# Altium PCB PCB-ESP32-C3-RF-V1.0.PcbDoc (part 4 of 4)
Units mil, origin at the board's own origin, x right, y up, seen from the top; angles counter-clockwise.
Board outline 1166.03 x 1736.03 mil, 4 copper layers (L1, L2, L3, L4), stack 30.315 mil thick; 70 components, 58 nets, 232 pads, 398 vias.
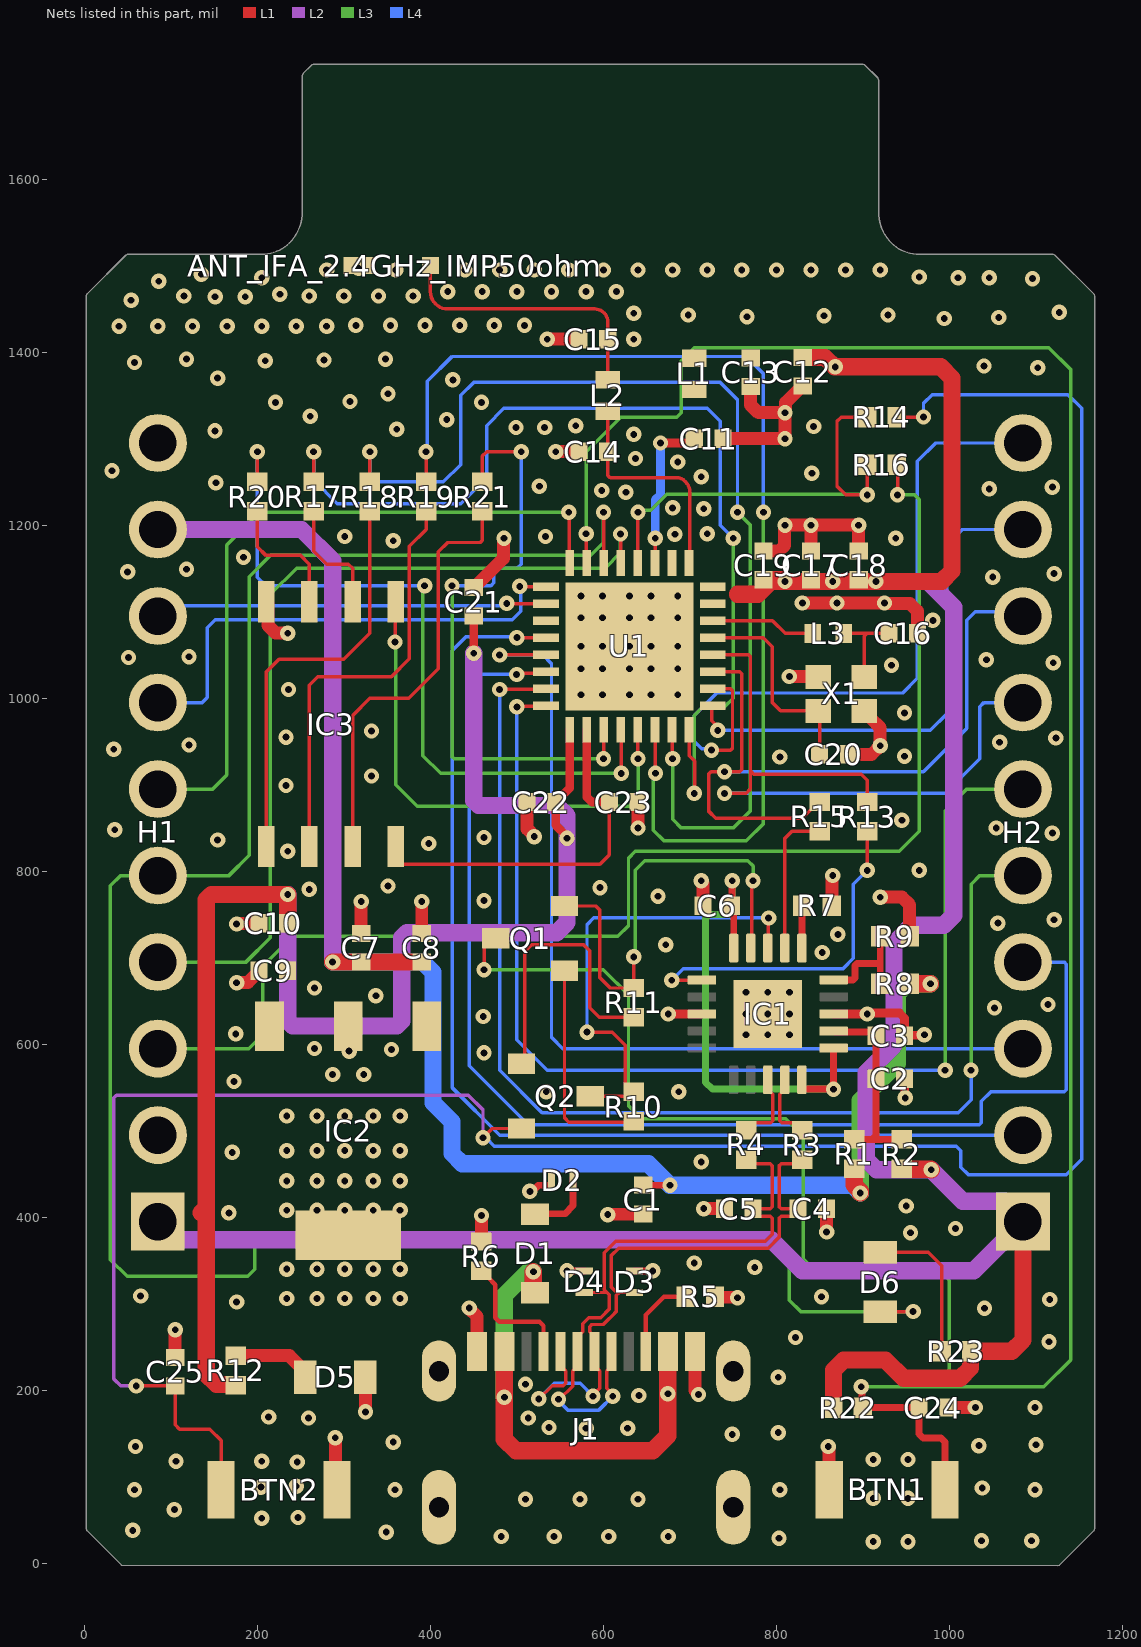
[diagram p4: the nets of this part, all layers, seen from the top]

## Via types
v1: diameter 17.72, hole 7.87, L1 to L4, tented both sides, 398 vias

## Nets (pads, with @x,y where several pads share a name; then routed paths per layer and width w, separated by ;. In a path a pad name is that pad's centre, name@x,y a point inside that pad or via, vN(x,y) a via of type N, cw(c..) or ccw(c..) an arc to the next point about the centre after c; other vN are vias at no path point)
+3V3: C9.2 C10.2 C12.2 C13.2 C17.1 C18.2 C19.2 C21.2 C22.2 H1.1 H2.1 IC2.3 L1.2 R2.2 R12.2 R22.2 R23.2 U1.11 U1.17 U1.31 U1.32 | length 5236.6
  L1 w10: v1(450,1052) C21.2@450,1095 ; C22.2@544.84,880 544.84,853.25 558,840.09 v1(558,838) ; C22.2@549.68,885.63 550.47,885.63 561.1,896.26 U1.17@561.1,963.59
  L1 w20: H1.1@85,395 H1.1@95.14,405.14 ; 135.14,405.14 141,411 ; R12.2@175,205.98 174.37,206.61 152.72,206.61 141,218.33 141,411 ; C10.2@235,740 v1(235,773) 146.86,773 141,767.14 141,411 ; 755,1120 778.7,1120 793.7,1135 v1(810,1135) ; C19.2@785,1136.93 808.07,1136.93 v1(810,1135) ; C12.2@830.57,1393.9 856.2,1393.9 867.1,1383 v1(868,1383) 990,1383 1003,1370 1003,1147 991,1135 v1(915,1135) v1(865,1135) v1(810,1135) ; R22.2@865.98,180 865.98,223.28 877.7,235 926,235 947,214 1012.65,214 1024.37,225.72 1024.37,244.37 R23.2@1025,245 1072,245 1085,258 H2.1@1085,395 ; R2.2@945,455.98 945.49,455.49 978.51,455.49 v1(979,455)
  L2 w20: H1.1@85,395 106,374 794,374 830,338 1028,338 1061.54,371.54 1064,371.54 1085,392.54 H2.1@1085,395 ; v1(235,773) 235,626.86 240.86,621 361.14,621 367,626.86 367,723.14 372.86,729 546,729 558,741 558,864.28 546.28,876 455.86,876 450,881.86 v1(450,1052) ; v1(810,1135) v1(865,1135) 975,1135 1005,1105 1005,749.22 993.28,737.5 956.5,737.5 936,717 936,599 904,567 904,466.72 915.72,455 v1(979,455) 1015.54,418.46 H2.1@1064,418.46
  L3 w20: H2.1@1064,418.46 1085,397.46 H2.1@1085,395
+3V3_RF: C11.2 L1.1 U1.2 U1.3 | length 182.3
  L1 w4: U1.3@659.53,1156.41 659.76,1156.64 659.76,1184.76 v1(660,1185) ; C11.2@700,1295 C11.2@705,1300
  L1 w10: v1(666,1295) C11.2@700,1295
  L4 w10: v1(660,1185) 660,1229.57 666,1235.57 v1(666,1295)
+5V: C1.2 C7.2 C8.2 D1.C D2.2 H1.9 IC2.1 R1.2 R8.2 | length 2070.4
  L1 w8: D1.C@521,403.28 521.72,404 555.37,404 565,413.63 D2.2@565,443 D2.2@565,444.47 ; C1.2@646,437 v1(677,437)
  L1 w20: v1(287,695) C7.2@320,695 C8.2@390,695 ; R1.2@890,455.98 890,437.17 897,430.17 v1(897,428) ; R8.2@954.02,670 v1(978,670)
  L2 w20: H1.9@85,1195 251,1195 287,1159 v1(287,695)
  L3 w20: v1(897,428) 897,535 940,578 940,658.28 951.72,670 v1(978,670)
  L4 w20: v1(287,695) 391.28,695 403,683.28 403,532.45 424.95,510.5 424.95,473.72 436.67,462 652,462 v1(677,437) 888,437 v1(897,428)
BTN_GPIO_0: BTN2.2 C25.2 Q2.2 R14.1 | length 2922.6
  L1 w4: v1(60,205) C25.2@105,205 105,160 110,155 145,155 158.07,141.93 BTN2.2@158.07,85 ; v1(460.79,491.79) 471.6,502.6 Q2.2@505.24,502.6 ; R14.1@939.02,1325 v1(970,1325)
  L2 w4: v1(60,205) 42,205 34,213 34,538 37.14,541.14 443.86,541.14 460.79,524.21 v1(460.79,491.79)
  L4 w4: v1@55,210 v1(60,205) ; v1(460.79,491.79) 464.21,491.79 474,482 1008,482 1013,477 1013,458 1022,449 1135,449 1153,467 1153,1335 1137,1351 980,1351 970,1341 v1(970,1325)
CHIP_EN: BTN1.2 C24.2 Q1.3 R22.1 U1.7 | length 3409.4
  L1 w4: v1(462,686) 462,712.59 471.81,722.4 Q1.3@475.47,722.4 ; v1(580,1190) 580.39,1189.61 580.39,1156.8 U1.7@580.79,1156.41
  L1 w8: v1(898,204) 899,203 899,181 R22.1@900,180 C24.2@965,180 965,149.69 969.69,145 990.31,145 995,140.31 BTN1.2@995,85
  L3 w4: v1(462,686) 600,686 629,657 629,529 644,514 811,514 831,494 831,352 849,334 993,334 1000,327 1000,213.92 1009.92,204 ; v1(580,1190) 580,1285 620,1325 685,1325 690,1330 690,1390 705,1405 1115,1405 1140,1380 1140,235 1109,204 1009.92,204 ; v1(898,204) 1009.92,204
DTR_FTDI: IC1.18 Q2.3 R10.1 | length 533.9
  L1 w4: v1(581,614) 610,614 625.19,598.81 625.19,553.63 633.82,545 R10.1@635,545 630,540 Q2.3@584.76,540 ; IC1.18@790,711.18 790.5,711.68 790.5,745.5 v1(791,746)
  L4 w4: v1(581,614) 581,738 589,746 v1(791,746)
FTDI_USB_N: IC1.9 R3.2 | length 80.4
  L1 w4: IC1.9@809.68,558.82 809.68,547.6 806.37,544.28 806.19,544.28 803.84,541.94 803.84,511.6 806.19,509.26 821.37,509.26 R3.2@830,500.63
FTDI_USB_P: IC1.8 R4.2 | length 83.7
  L1 w4: R4.2@765,504.02 770.24,509.26 793.5,509.26 795.84,511.6 795.84,541.94 793.5,544.28 793.32,544.28 790,547.6 IC1.8@790,558.82
GND: ANT_IFA_2.4GHz_IMP50ohm.1 BTN1.1 BTN2.1 C1.1 C2.1 C3.1 C4.1 C5.1 C6.1 C7.1 C8.1 C9.1 C10.1 C11.1 C12.1 C13.1 C14.1 C15.1 C16.1 C17.2 C18.1 C19.1 C20.1 C21.1 C22.1 C23.1 C24.1 C25.1 D2.1 D3.2 D4.2 D5.1 H1.2 H1.10 IC1.3 IC1.13 IC1.21 IC2.2 IC2.4 IC3.4 J1.A1B12 J1.B1A12 J1.SH1 J1.SH2 J1.SH3 J1.SH4 R5.2 R6.2 R7.1 R9.1 U1.33 X1.2 X1.4 | length 1960.1
  L1 w8: v1(515,429.86) 517.63,429.86 524.76,436.98 D2.1@539.97,436.98 ; D2.1@540,437.02 D2.1@540,443 ; v1(558,338) D4.2@578,338 ; D3.2@636,338 v1(657,338)
  L1 w10: v1(605,403) v1@605.47,403.47 ; C1.1@646.47,403.47 C1.1@647,404 ; v1(675,635) IC1.3@713.82,635 ; IC1.13@866.18,635 v1(905,635) 906.06,636.06 942.21,636.06 948.07,630.2 C3.1@948.07,610 948.57,610.5 970.5,610.5 v1(971,611) ; C2.1@948.07,560 948.53,559.53 948.53,538.47 v1(949,538)
  L1 w15: C25.1@105,238.07 v1(105,270) ; v1(176,671) 176.52,671.52 189.24,671.52 201.93,684.21 C9.1@201.93,685 ; v1(176,739) 176.5,739.5 201.43,739.5 C10.1@201.93,740 ; IC3.4@210,1111.53 212,1109.53 212,1084.31 220.79,1075.52 234.48,1075.52 v1(235,1075) ; v1(290,145) 290.52,144.48 290.52,86.41 BTN2.1@291.93,85 ; C7.1@320,728.07 v1(320,765) ; D5.1@324.5,215 324.75,214.75 324.75,175.25 v1(325,175) ; C8.1@390,728.07 v1(390,765) ; v1(445,295) 445,294.26 454.02,285.25 J1.A1B12@454.02,244.84 ; C21.1@450,1128.07 450.79,1128.07 484.48,1161.76 484.48,1184.48 v1(485,1185) ; R6.2@459,372 v1(459,402) ; C22.1@511.77,880 511.77,848.96 520,840.74 v1(520,840) ; v1(535,1415) C15.1@571.93,1415 ; v1(545,1285) C14.1@571.93,1285 ; v1@605.47,403.47 C1.1@646.47,403.47 ; C23.1@639.84,880 639.92,879.92 639.92,850.08 v1(640,850) ; v1@679.26,1220 v1(680,1220) v1@680,1219.26 ; J1.B1A12@705.98,244.84 705.98,199.75 710,195.74 v1(710,195) ; v1(713,789) 713,788.26 715,786.26 C6.1@715,760 ; v1(716,410) C5.1@739.93,410 ; R5.2@729,308 729.5,307.5 754.5,307.5 v1(755,307) ; C11.1@738.07,1300 v1(810,1300) v1(810,1330) ; C13.1@770.28,1360.07 770.28,1338.79 779.07,1330 v1(810,1330) ; C19.1@785,1170 785.16,1170.16 803.02,1170.16 809.48,1176.62 809.48,1199.48 v1(810,1200) v1(840,1200) ; v1(815,1025) 848.11,1025 X1.2@848.43,1024.69 ; v1(830,1110) v1(870,1110) v1(925,1110) 925.52,1109.48 954.28,1109.48 963.07,1100.69 C16.1@963.07,1075 ; C12.1@830.57,1360.83 829.78,1360.83 810.52,1341.57 810.52,1330.52 v1(810,1330) ; C17.2@840,1170 v1(840,1200) ; v1(858,383) C4.1@858.03,409.97 ; v1(860,135) 860.52,134.48 860.52,85.62 BTN1.1@861.14,85 ; R7.1@864.02,760 864.02,793.28 865,794.26 v1(865,795) ; C20.1@883.07,935 909.96,935 v1(920,945) ; C18.1@895,1170 v1(895,1200) v1(840,1200) ; X1.4@901.57,985.31 902.56,985.31 908.84,979.04 908.84,977.07 920,965.91 v1(920,945) ; v1(920,770) 945.23,770 954.02,761.21 R9.1@954.02,725 ; C24.1@998.07,180 v1(1030,180)
  other v1: 912,25 952,25 1037,26 1095,26 803,29 482,31 543,31 606,31 675,31 349,36 56,38 205,52 247,53 104,62 510,74 573,74 640,74 912,75 952,75 58,85 359,85 804,85 1099,85 1038,87 204,88 245,89 246,117 106,118 205,118 912,120 952,120 59,135 1034,136 1100,137 357,140 749,149 802,151 580,156 628,156 537,157 259,168 513,168 213,169 1099,180 641,194 510,207 802,215 1115,256 822,261 1040.63,294.75 176,302 1116,305 234,306 269,306 301,306 334,306 365,306 852,308 65,309 234,340 269,340 301,340 334,340 365,340 775,342 705,347 955,382 1007,387 167,405 234,408 269,408 301,408 334,408 365,408 950,413 234,442 269,442 301,442 334,442 365,442 713,464 171,475 234,477 269,477 301,477 334,477 365,477 234,517 269,517 301,517 334,517 365,517 534,545 687,545 173,557 287,565 323,565 462,590 306,592 355,594 266,595 765,610.86 790,610.86 815,610.86 175,612 461,632 765,635 790,635 815,635 1052,642 1114,646 337,656 765,660 790,660 815,660 266,665 853,706 672,715 871,727 1056,740 1121,744 462,766 663,771 260,779 596,781 351,783 965,801 235,823 398,832 154,836 462,839 1119,844 35,847.87 1054,850 945,859 233,899 332,910 804,932 948,933 34,941 121,946 1058,949 1123,954 233,955 332,962 948,983 574,1004 599,1004 630,1004 655,1004 686,1004 236,1010 574,1034 599,1034 630,1034 655,1034 686,1034 933,1038 1120,1041 1042.68,1044.37 51,1047 121,1048 574,1060 599,1060 630,1060 655,1060 686,1060 980.86,1090 574,1093 599,1093 630,1093 655,1093 686,1093 574,1118 599,1118 630,1118 655,1118 686,1118 1050,1140 1121,1144 50,1146 118,1149 184,1163 357,1182 938,1185 301,1187 533,1187 682.62,1189.63 720,1190 716,1219 626,1238 598,1240 1046,1242 1119,1244 526,1245 152,1249 713,1256 841,1260 32,1263 686,1273 637,1277 635,1305 151,1309 361,1311 499,1313 532,1313 843,1314 568,1315 419,1322 261,1326 221,1342 459,1342 307,1343 351,1352 426,1368 154,1370 1102,1382 1040,1384 58,1388 209,1390 277,1391 118,1392 348,1392 635,1415 40,1430 85,1430 125,1430 165,1430 205,1430 245,1430 280,1430 313.83,1430.94 353.83,1430.94 393.83,1430.94 433.83,1430.94 473.83,1430.94 508.83,1430.94 994,1439 1057,1440 766,1441 855,1442 698,1443 929,1443 635,1445 1127,1446 54,1460 151.17,1464.06 186,1464 115,1465 260,1465 300,1465 340,1465 380,1465 226,1467 420,1470 460,1470 500,1470 540,1470 580,1470 615,1470 86,1482 1096,1485 205,1486 1010,1486 1046,1486 965,1487 135,1490 280,1495 360,1495 440,1495 480,1495 520,1495 560,1495 600,1495 640,1495 680,1495 720,1495 760,1495 800,1495 840,1495 880,1495 920,1495 317,1497
GPIO_0: H1.3 R16.1 | length 1522.2
  L1 w4: R16.1@939.02,1270 940,1269.02 v1(940,1235)
  L3 w4: H1.3@85,595 190,595 206,611 206,690 240.66,724.66 616.66,724.66 629,737 629,815 637,823 942,823 965,846 965,1229.66 959.66,1235 v1(940,1235)
GPIO_1: H1.4 U1.5 | length 1018.5
  L1 w4: v1(619.68,1189.84) 620,1189.52 620,1185 620.16,1184.84 U1.5@620.16,1156.41
  L3 w4: H1.4@85,695 186.87,695 215,723.13 215,1120 245.28,1150.28 601.91,1150.28 619.68,1168.05 v1(619.68,1189.84)
GPIO_2: D6.1 H1.5 U1.6 | length 2509.6
  L1 w4: v1@600,1210 600.24,1209.76 600.24,1156.64 U1.6@600.47,1156.41 ; D6.1@920,290.5 920.5,291 v1(958,291)
  L3 w4: v1(600,1215) 600,1179.47 585.59,1165.06 215.19,1165.06 190.5,1140.38 190.5,818.29 167.22,795 H1.5@85,795 42,795 30,783 30,351 49.34,331.66 189,331.66 189,332 197,340 197,364 206,373 790,373 815,348 815,304 828,291 v1(958,291)
GPIO_3: H1.6 U1.8 | length 817.3
  L1 w4: v1@560,1210 560.55,1209.45 560.55,1156.96 U1.8@561.1,1156.41
  L3 w4: H1.6@85,895 148.51,895 164.76,911.25 164.76,1177.11 202.65,1215 v1(560,1215)
GPIO_4: H1.7 U1.9 | length 570
  L1 w4: v1(503.23,1129.28) 503.42,1129.09 533.4,1129.09 U1.9@533.59,1128.9
  L4 w4: H1.7@85,995 136.02,995 141.81,1000.79 141.81,1081.43 151.24,1090.86 494.75,1090.86 504.2,1100.31 504.2,1128.31 v1(503.23,1129.28)
GPIO_5: H1.8 U1.10 | length 454.8
  L1 w4: v1(488.34,1109.6) 488.73,1109.21 U1.10@533.59,1109.21
  L4 w4: H1.8@85,1095 96.98,1106.98 485.72,1106.98 v1(488.34,1109.6)
GPIO_6: H2.2 U1.12 | length 1303.7
  L1 w4: v1(500,1070) 500.08,1069.92 533.52,1069.92 U1.12@533.59,1069.84
  L4 w4: v1(500,1070) 498.7,1071.3 441.3,1071.3 425,1055 425,550 480,495 H2.2@1085,495
GPIO_7: H2.3 U1.13 | length 1100.2
  L1 w4: v1(480,1050) 480.08,1050.08 533.52,1050.08 U1.13@533.59,1050.16
  L4 w4: v1(480,1050) 530,1050 540,1040 540,608 553,595 H2.3@1085,595
GPIO_8: H2.4 U1.14 | length 1483.5
  L1 w4: v1(499.69,1027.45) 501.2,1028.96 532.08,1028.96 U1.14@533.59,1030.47
  L4 w4: v1(499.69,1027.45) 452.45,1027.45 445,1020 445,575 513,507 1034.66,507 1037,509.34 1037,534 1048,545 1132.66,545 1135,547.34 1135,692.66 1132.66,695 H2.4@1085,695
GPIO_9: H2.5 U1.15 | length 1378.6
  L1 w4: v1(480,1010) 480.39,1010.39 533.2,1010.39 U1.15@533.59,1010.79
  L3 w4: v1(1025,570) 1025,785 1035,795 H2.5@1085,795
  L4 w4: v1(480,1010) 480,570 529,521 1010,521 1025,536 v1(1025,570)
GPIO_10: H2.6 U1.16 | length 1328.9
  L1 w4: v1(500,990) 500.55,990.55 533.04,990.55 U1.16@533.59,991.1
  L3 w4: v1(995,570) 995,870 1020,895 H2.6@1085,895
  L4 w4: v1(500,990) 500,605 535,570 v1(995,570)
GPIO_18: H2.9 U1.25 | length 595
  L1 w4: U1.25@726.41,991.1 725,989.7 725,973.71 732.17,966.54 v1(732.17,962.83)
  L4 w4: v1(732.17,962.83) 977.83,962.83 996.72,981.72 996.72,1176.72 1015,1195 H2.9@1085,1195
GPIO_19: H2.10 U1.26 | length 826.7
  L1 w4: v1(725,940) 746.87,940 749.21,942.34 749.21,1008.44 746.87,1010.79 U1.26@726.41,1010.79
  L4 w4: v1(725,940) 723.49,941.51 713.49,941.51 705,950 705,980 731,1006 946,1006 963,1023 963,1274 984,1295 H2.10@1085,1295
LNA_IN: C14.2 L2.2 U1.1 | length 262.1
  L1 w4: L2.2@605,1331.89 C14.2@605,1285 605,1258.87 ccw(c609,1258.87) 609,1254.87 685,1255 cw(c685,1242.93) 693.54,1251.46 695,1250 cw(c682.93,1237.93) 700,1237.93 700,1159.07 cw(c696.24,1159.07) U1.1@698.9,1156.41
NetANT_IFA_2.4GHz_IMP50ohm_2: ANT_IFA_2.4GHz_IMP50ohm.2 C15.2 L2.1 | length 321.9
  L1 w4: ANT_IFA_2.4GHz_IMP50ohm.2@400,1500 400,1470 ccw(c420,1470) 420,1450 590,1450 cw(c590,1435) 605,1435 C15.2@605,1415 L2.1@605,1368.11
NetC2_2: C2.2 C3.2 IC1.12 R1.1 R2.1 | length 228
  L1 w8: IC1.12@866.18,615.31 867.5,614 911,614 C3.2@915,610 C2.2@915,560 915,494.69 910.31,490 ; R1.1@890,490 910.31,490 ; R2.1@945,490 910.31,490
NetC6_2: C6.2 IC1.10 IC1.11 IC1.20 | length 584.2
  L1 w8: v1(749,789) 748.53,788.53 748.53,760.47 C6.2@748.07,760 750.63,757.44 IC1.20@750.63,711.18 ; IC1.10@829.37,558.82 829.37,549.31 830.69,548 v1(866,548) 866,595.45 IC1.11@866.18,595.63
  L3 w8: v1(749,789) 749,754.69 744.31,750 722.69,750 718,745.31 718,556 726,548 v1(866,548)
  L4 w8: v1@865.5,548.5 v1(866,548)
NetC16_2: C16.2 L3.1 X1.1 | length 103.7
  L1 w4: L3.1@878,1075 905,1075 ; X1.1@901.57,1024.69 901.57,1071.57 905,1075 ; C16.2@930,1075 905,1075
NetD1_A: D1.A J1.A4B9 J1.B4A9 | length 588
  L1 w20: J1.A4B9@485.51,244.84 485.51,143.49 499,130 657,130 674.49,147.49 J1.B4A9@674.49,244.84 ; v1(519,337) 519,314.72 D1.A@521,312.72
  L3 w20: v1(485.51,192) 485.51,309.51 513,337 v1(519,337)
  other v1: 674.49,196
NetD5_2: D5.2 R12.1 | length 94.7
  L1 w15: R12.1@175,240 237,240 255.5,221.5 D5.2@255.5,215
NetD6_2: D6.2 R23.1 | length 176.4
  L1 w4: D6.2@920,359.5 975.5,359.5 990.98,344.02 R23.1@990.98,245
NetIC1_15: IC1.15 R8.1 R9.2 | length 126
  L1 w8: IC1.15@866.18,674.37 888.66,674.37 891,676.71 891,691 893.34,693.34 917.66,693.34 920,691 ; R8.1@920,670 920,691 ; R9.2@920,725 920,691
NetIC1_16: IC1.16 R7.2 | length 49.1
  L1 w8: IC1.16@829.37,711.18 829.68,711.5 829.68,759.69 R7.2@830,760
NetJ1_A5: J1.A5 R6.1 | length 150.8
  L1 w5: R6.1@459,337.98 460.18,337.98 466.81,331.35 466.81,330.17 475,321.98 475,283.9 479.69,279.21 526.1,279.21 530.79,274.53 J1.A5@530.79,244.84
NetJ1_B5: J1.B5 R5.1 | length 96.9
  L1 w5: J1.B5@648.9,244.84 648.9,286.9 670,308 R5.1@694.98,308
NetQ1_1: Q1.1 R10.2 | length 252.5
  L1 w4: Q1.1@555,685 555,515 560,510 634.02,510 R10.2@635,510.98
NetQ2_1: Q2.1 R11.2 | length 333.9
  L1 w4: Q2.1@505.24,577.4 509,581.17 509,707 517,715 577,715 584,708 584,642 595.02,630.98 R11.2@635,630.98
NetR14_2: R14.2 R16.2 U1.4 | length 518.9
  L1 w4: U1.4@639.84,1156.41 639.92,1156.48 639.92,1214.92 v1(640,1215) ; R16.2@905,1270 v1(905,1235) 880,1235 870,1245 870,1320 875,1325 R14.2@905,1325
  L3 w4: v1(640,1215) 642.29,1217.29 654.86,1217.29 673.43,1235.86 904.14,1235.86 v1(905,1235)
NetR17_1: R17.1 U1.24 | length 1182.1
  L1 w4: R17.1@265,1250 v1(265,1285) ; U1.24@698.9,963.59 699.45,963.04 699.45,933.69 705.73,927.4 705.73,890.73 v1(705,890)
  L3 w4: v1(705,890) 705,980 715,990 740,990 750,1000 v1(750,1185)
  L4 w4: v1(265,1285) 265,1252.34 292.34,1225 435,1225 465,1255 465,1315 485,1335 720,1335 735,1320 735,1200 v1(750,1185)
NetR18_1: R18.1 U1.23 | length 1279.5
  L1 w4: R18.1@330,1250 v1(330,1285) ; U1.23@679.21,963.59 679.61,963.2 679.61,930.39 v1(680,930)
  L3 w4: v1(680,930) 680,860 690,850 750,850 770,870 770,1200 v1(755,1215)
  L4 w4: v1(330,1285) 330,1260 340,1250 415,1250 435,1270 435,1350 450,1365 735,1365 755,1345 v1(755,1215)
NetR19_1: R19.1 U1.22 | length 1304
  L1 w4: R19.1@395,1250 v1(395,1285) ; U1.22@659.53,963.59 659.88,963.24 659.88,913.69 v1(660.24,913.33)
  L3 w4: v1(660.24,913.33) 657.75,910.84 657.75,847.25 670,835 765,835 785,855 v1(785,1215)
  L4 w4: v1(395,1285) 396.51,1286.51 396.51,1366.51 425,1395 765,1395 785,1375 v1(785,1215)
NetR20_1: R20.1 U1.20 | length 863
  L1 w4: R20.1@200,1250 v1(200,1285) ; U1.20@620.16,963.59 620.37,963.39 620.37,913.3 v1(620.58,913.09)
  L3 w4: v1(393.28,1130) 391.36,1128.07 391.36,933.64 411.91,913.09 v1(620.58,913.09)
  L4 w4: v1(200,1285) 200,1140 210,1130 v1(393.28,1130)
NetR21_1: R21.1 U1.19 | length 713.3
  L1 w4: R21.1@460,1250 460,1280 465,1285 v1(505,1285) ; v1(600,930) 600.24,930.24 600.24,963.36 U1.19@600.47,963.59
  L3 w4: v1(425,1130) 425,932.34 427.34,930 v1(600,930)
  L4 w4: v1(425,1130) 470,1130 473.26,1133.26 473.26,1147.66 475.6,1150 500,1150 505,1155 v1(505,1285)
RTS_FTDI: IC1.19 Q1.2 R11.1 | length 540.8
  L1 w4: Q1.2@555,759.8 591.2,759.8 596,755 596,677 608,665 R11.1@635,665 v1(635,701) ; IC1.19@770.32,711.18 771.66,712.52 771.66,787.66 v1(773,789)
  L3 w4: v1(635,701) 637,703 637,801 648,812 767,812 773,806 v1(773,789)
RXD_FTDI: IC1.1 R13.2 | length 411.2
  L1 w4: v1@678,672 678,673 v1(679,674) 679.19,674.19 713.63,674.19 IC1.1@713.82,674.37 ; v1(905,801) R13.2@905,845.98
  L4 w4: v1(679,674) 692.34,687.34 877,687.34 889,699.34 889,785 v1(905,801)
SPICLK: IC3.6 R19.2 | length 493.2
  L1 w4: IC3.6@260,828.47 260,1015 270,1025 355,1025 375.5,1045.5 375.5,1175.5 395,1195 R19.2@395,1215.98
SPICS0: IC3.1 U1.21 | length 585.4
  L1 w4: v1(359.14,1065) 359.14,1110.67 IC3.1@360,1111.53 ; U1.21@639.84,963.59 639.92,963.52 639.92,930.08 v1(640,930)
  L3 w4: v1(359.14,1065) 360,1064.14 360,900 385,875 630,875 640,885 v1(640,930)
SPID: IC3.5 R18.2 | length 481.2
  L1 w4: IC3.5@210,828.47 210,1030 225,1045 300,1045 330,1075 R18.2@330,1215.98
SPIHD: IC3.7 R21.2 | length 498.1
  L1 w4: IC3.7@310,828.47 310,980 330,1000 375,1000 409.14,1034.14 409.14,1169.14 420,1180 457.66,1180 460,1182.34 R21.2@460,1215.98
SPIQ: IC3.2 R17.2 | length 137.7
  L1 w4: R17.2@265,1215.98 265,1170 280,1155 305,1155 310,1150 IC3.2@310,1111.53
SPIWP: IC3.3 R20.2 | length 152.7
  L1 w4: R20.2@200,1215.98 200,1175 210,1165 250,1165 260,1155 IC3.3@260,1111.53
TXD_FTDI: IC1.17 R15.2 | length 170.3
  L1 w4: IC1.17@809.68,711.18 809.84,711.34 809.84,837.84 817.98,845.98 R15.2@850,845.98
U0RXD: H2.8 R15.1 U1.27 | length 865.1
  L1 w4: U1.27@726.41,1030.47 757.66,1030.47 760,1028.13 760,917.34 757.66,915 v1(740,915) 724.34,915 722,912.66 722,869 730,861 829.82,861 848.82,880 R15.1@850,880
  L4 w4: v1(740,915) 970,915 1020,965 1020,1090 1030,1100 1080,1100 H2.8@1085,1095
U0TXD: H2.7 R13.1 U1.28 | length 817.6
  L1 w4: U1.28@726.41,1050.16 767.7,1050.16 770.04,1047.81 770.04,915.96 ; v1(740,890) 765,890 770.04,895.04 770.04,915.96 ; R13.1@905,880 905,905 898,912 774,912 770.04,915.96
  L4 w4: v1(740,890) 995,890 1035,930 1035,990 1040,995 H2.7@1085,995
USB_D_N: C4.2 D3.1 J1.A7 J1.B7 R3.1 | length 716.4
  L1 w4: v1(525.28,190) 540.67,205.38 553.6,205.38 556.31,208.09 556.31,222.23 550.47,228.07 J1.B7@550.47,244.84 ; v1(588,193) 588,194.49 595.71,202.2 595.71,222.2 589.84,228.07 J1.A7@589.84,242.5 ; J1.A7@589.84,244.84 589.84,261.61 584,267.46 584,273.48 586.52,276 600,276 604.69,280.69 610.31,286.31 615,291 615,310 618,313 D3.1@636,313 ; 615,313.31 608.81,319.5 608.81,355.5 617.67,364.36 790.33,364.36 803,377.03 803,399.03 805.34,401.37 817.16,401.37 825,409.21 C4.2@825,410 805.34,410 803,412.34 803,459.27 805.34,461.61 825,461.61 R3.1@830,466.61
  L4 w4: v1(525.28,190) 543.14,207.86 573.14,207.86 v1(588,193)
USB_D_P: C5.2 D4.1 J1.A6 J1.B6 R4.1 | length 733.8
  L1 w4: v1(548,189.53) 549.06,189.53 564.31,204.78 564.31,222.23 570.16,228.07 J1.A6@570.16,244.84 570.16,261.61 576,267.46 576,276.79 583.21,284 596.69,284 607,294.31 607,310 605.5,311.5 ; D4.1@578,313 604,313 ; J1.B6@609.53,261.61 J1.B6@609.53,244.84 609.53,228.07 603.71,222.25 603.71,202.2 610.72,195.19 v1(610.72,193) ; R4.1@765,466.61 770,461.61 792.66,461.61 795,459.27 795,412.34 792.66,410 C5.2@773,410 773,409.21 780.84,401.37 792.66,401.37 795,399.03 795,380.34 787.01,372.36 614.36,372.36 600.81,358.81 600.81,316.19 604,313 ; 604,313 605.5,311.5 ; 604,313 605.5,311.5
  L4 w4: v1(548,189.53) 548,188.12 558.98,177.14 594.86,177.14 v1(610.72,193)
VDD_SPI: C23.2 IC3.8 U1.18 | length 434.7
  L1 w4: IC3.8@360,828.47 360,815.5 367.5,808 596,808 606.77,818.77 C23.2@606.77,880
  L1 w10: U1.18@580.79,963.59 580.79,885.86 586.65,880 C23.2@606.77,880
XTAL_N: C20.2 U1.29 X1.3 | length 245.9
  L1 w4: U1.29@726.41,1069.84 784.84,1069.84 795,1059.69 795,995 804.68,985.31 X1.3@848.43,985.31 850,983.74 C20.2@850,935
XTAL_P: L3.2 U1.30 | length 121.6
  L1 w4: U1.30@726.41,1089.53 795.47,1089.53 810,1075 L3.2@842,1075
pads on no net: IC1.2 IC1.4 IC1.5 IC1.6 IC1.7 IC1.14 J1.A8 J1.B8

## Polygon pours and split planes (outlines as drawn)
GND on L2 "GND_L02_P000" (solid, remove dead copper, pour order 0): 8,1464 51,1507 1119,1507 1162,1464 1162,41 1124,3 46,3 8,41
GND on L3 "GND_L03_P002" (solid, remove dead copper, pour order 2): 6.04,1468.14 49.04,1511.14 1117.04,1511.14 1160.04,1468.14 1160.04,45.14 1122.04,7.14 44.04,7.14 6.04,45.14
GND on L4 "GND_L04_P003" (solid, remove dead copper, pour order 3): 6.04,1468.14 49.04,1511.14 1117.04,1511.14 1160.04,1468.14 1160.04,45.14 1122.04,7.14 44.04,7.14 6.04,45.14

## Keep-outs
Keep-Out Layer:
  lines w6: 125,1510 205,1510 ; 125,1510 50,1510 5,1465 5,40 45,0 175,0 995,0 1125,0 1165,40 1165,1465 1120,1510 1045,1510 ; 125,1510 205,1510 ; 205,1510 ccw(c205,1558.28) 239.14,1524.14 ; 205,1510 ccw(c205,1558.28) 239.14,1524.14 ; 205,1510 ccw(c205,1558.28) 239.14,1524.14 ; 205,1510 ccw(c205,1558.28) 239.14,1524.14 ; 239.14,1524.14 ccw(c200.86,1562.43) 255,1562.43 ; 239.14,1524.14 ccw(c200.86,1562.43) 255,1562.43 ; 239.14,1524.14 ccw(c200.86,1562.43) 255,1562.43 ; 239.14,1524.14 ccw(c200.86,1562.43) 255,1562.43 ; 255,1562.43 255,1685 ; 255,1562.43 255,1685 ; 255,1562.43 255,1685 ; 255,1562.43 255,1685 ; 255,1685 255,1715 255,1720 ; 255,1720 265,1730 ; 255,1720 265,1730 ; 265,1730 900,1730 915,1715 915,1685 ; 915,1562.43 ccw(c969.14,1562.43) 930.86,1524.14 ; 915,1562.43 ccw(c969.14,1562.43) 930.86,1524.14 ; 915,1562.43 ccw(c969.14,1562.43) 930.86,1524.14 ; 915,1562.43 ccw(c969.14,1562.43) 930.86,1524.14 ; 915,1562.43 915,1685 ; 915,1562.43 915,1685 ; 915,1562.43 915,1685 ; 915,1562.43 915,1685 ; 930.86,1524.14 ccw(c965,1558.28) 965,1510 ; 930.86,1524.14 ccw(c965,1558.28) 965,1510 ; 930.86,1524.14 ccw(c965,1558.28) 965,1510 ; 930.86,1524.14 ccw(c965,1558.28) 965,1510 ; 965,1510 1045,1510 ; 965,1510 1045,1510

## Other copper
L1:
  region net GND: 286.9,650 322,650 322,583 351,554 375,554 375,527 223,527 223,554 257.01,554 286.9,583.89
  region net GND: 223,528 375,528 375,281 223,281
  region net +5V: 400.63,704.84 412.5,692.97 412.5,641 379.5,641 379.5,674 368.5,685 360,685
  region net +3V3: 841.2,1384.06 852.26,1373 872,1373 872,1379 868,1383
  region net +3V3: 813,1126 798,1111 798,1104 783,1104 785,1106 785,1126.3 807.7,1126.3 808,1126
  region net +3V3: 774.37,1146.77 761.51,1133.91 781.98,1133.91 785,1136.93
  region net +3V3: 836,1404 866,1404 877,1393 877,1374 858,1374 858,1380 855,1383 836,1383
  region net +3V3: 116,428.46 139.54,452 145,452 145,390.54 116,361.54
  region net +3V3: 225.16,750.63 244.84,750.63 244.84,674.37 244.84,592 197.5,592 197.5,649.5 225.16,649.5
  region net +5V: 309.37,704.84 400.63,704.84 400.63,685.16 309.37,685.16
  region net +5V: 586,455 561,455 561,423 554,416 504,416 504,390 586,390
  region net +5V: 561,455 686,455 686,427 592,427 584,419
  region net NetD1_A: 504,300 504,356 540,356 540,300
  region net +3V3_RF: 695.16,1289.37 714.84,1289.37 714.84,1362.4 719.37,1366.93 690.63,1366.93 690.63,1293.9
  region net +3V3: 690.63,1403.15 691.22,1403.74 841.2,1403.74 841.2,1384.06 840.21,1383.07 690.63,1383.07
  region net +3V3: 548.5,1084.51 547.85,1085.16 439.37,1085.16 439.37,1095 439.83,1094.54 548.5,1094.54
  region net +3V3: 905.63,1146.8 925,1146.8 925,1127.09 905.63,1127.09
  region net +3V3: 741.31,1134.03 797.65,1134.03 797.65,1104.2 741.31,1104.2
  region net +3V3: 711.5,1133.91 711.5,1104.2 741.31,1104.2 741.31,1133.91
  region net +3V3: 774.37,1127.09 905.63,1127.09 905.63,1146.77 774.37,1146.77
  region net +3V3_RF: 684.23,1141.5 654.51,1141.5 654.51,1171.31 654.51,1188.33 667.94,1188.33 667.94,1171.31 684.23,1171.31
L3:
  region net NetD1_A: 476,196 476,118 490,104 494,104 680,104 691,115 691,205 664,205 662,205 659,202 659,143 648,132 507,132 496,143 496,196

## Silkscreen, mask and mechanical layers (free items; w line width, h text height)
Top Overlay:
  drawing of 8 lines, arcs and shapes, not listed
  text "B" at 70,65 h40
  text "RST" at 1045,65 h40
Bottom Overlay:
  drawing of 20 lines, arcs and shapes, not listed
  text "Design" at 754.33,1624.42 h40
  text "BY" at 754.33,1562.09 h40
  text "NQMINH" at 753.33,1503.09 h40
  text "GPIO_19" at 1003,1266 h60
  text "GND" at 325,1265 h60
  text "GPIO_18" at 1003,1170 h60
  text "5V" at 273.9,1165 h60
  text "GPIO_5" at 496.8,1070.08 h60
  text "UORXD" at 1000,1067 h60
  text "GPIO_4" at 500,970 h60
  text "UOTXD" at 999,967 h60
  text "GPIO_3" at 505.89,864.84 h60
  text "GPIO_10" at 1003,862 h60
  text "GPIO_9" at 1003,768 h60
  text "GPIO_2" at 502,765 h60
  text "GPIO_1" at 485,668 h60
  text "GPIO_8" at 1003,665 h60
  text "GPIO_0" at 506,566 h60
  text "GPIO_7" at 1003,565 h60
  text "GPIO_6" at 1003,465 h60
  text "GND" at 334,462 h60
  text "3V3" at 1003,364 h60
  text "3V3" at 335,363 h60

## Text inside footprints (layer, text, board x,y; h text height)
U1: Top Overlay "*" at 690,1195 h20 r270